# Altium PCB MONA-EXTENTION-BOARD.PCBDOC
Units mm, origin at the board's own origin, x right, y up, seen from the top; angles counter-clockwise.
Board outline 152.4 x 101.6 mm, 2 copper layers (Top Layer, Bottom Layer); 7 components, 0 nets, 99 pads, 0 vias.
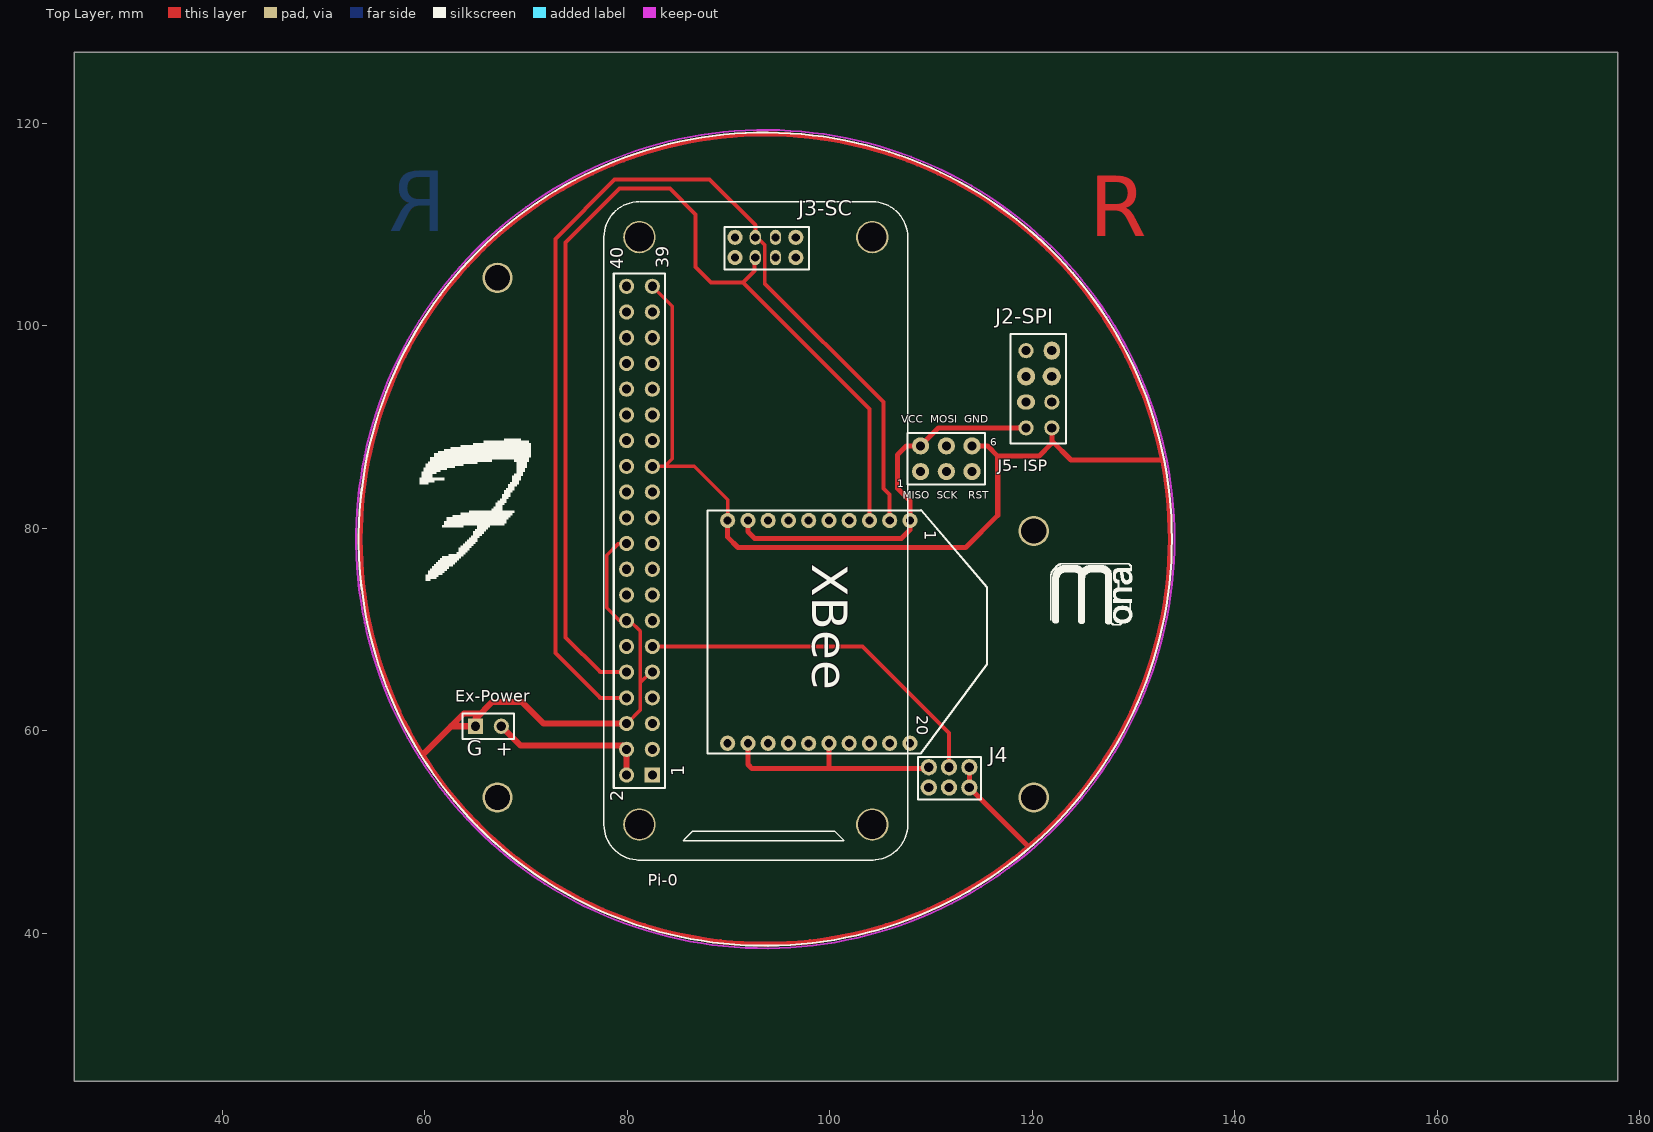
[diagram p0: Top Layer view]
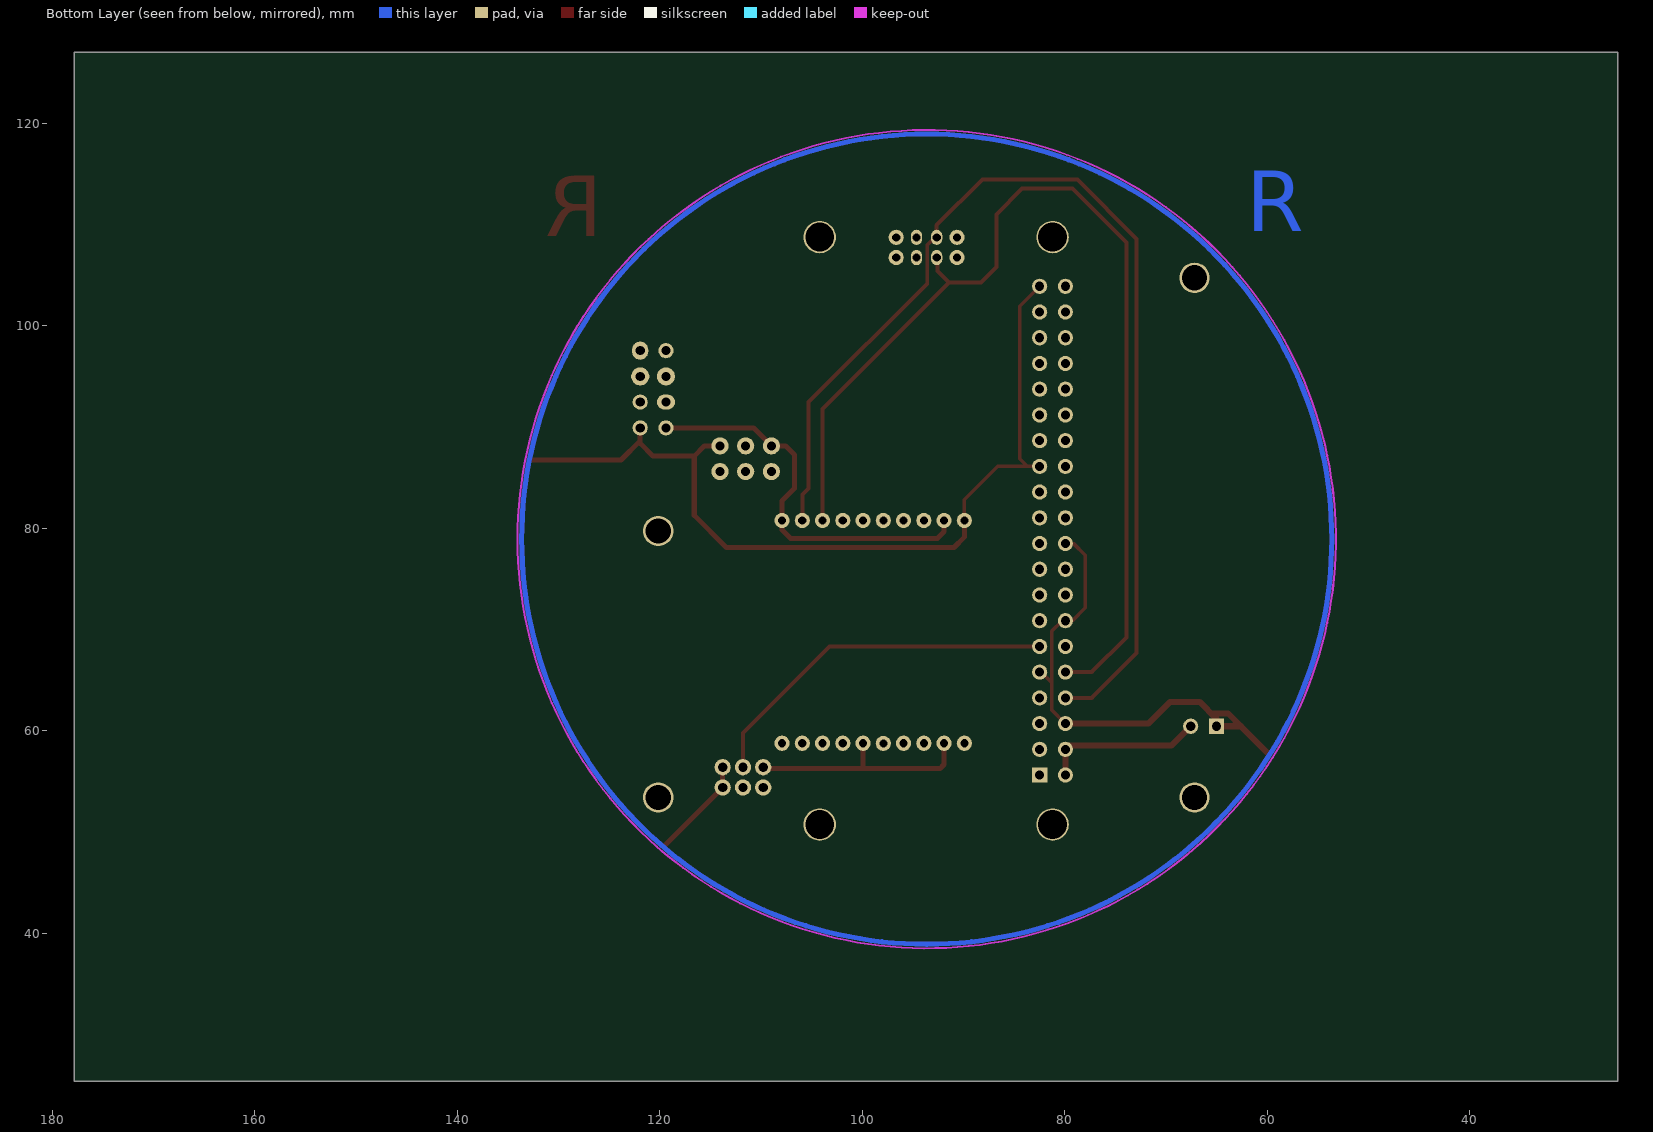
[diagram p1: Bottom Layer view, seen from below]

## Layer stack, top to bottom
Top Layer: signal copper 0.0356
Dielectric: dielectric 0.32, FR-4, Dk 4.8
Bottom Layer: signal copper 0.0356

## Board outline
25.4,25.4 177.8,25.4 177.8,127 25.4,127

## Design rules (kind name [scope] priority, off if disabled: settings)
Clearance [All] p1: gap=0.254
ComponentClearance [All] p1: gap=0.254 collisioncheckmode=3 verticalgap=0.254
PolygonConnect [All] p1: connectstyle=Relief reliefconductorwidth=0.254 reliefentries=4 polygonreliefangle="90 Angle"
RoutingVias [All] p1: holewidth=0.711 width=1.27 viastyle="Through Hole" minholewidth=0.711 minwidth=1.27 maxholewidth=0.711 maxwidth=1.27
SolderMaskExpansion [All] p1: expansion=0.102
TestPointUsage [All] p1: valid=0 allowmultiple=FALSE
Testpoint [All] p1: side=15 testpointundercomponent=TRUE minsize=1.016 maxsize=2.54 preferedsize=1.524 minholesize=0 maxholesize=1.016 preferedholesize=0.813 testpointgrid=0.025 style=1023 order=0123456789
Width [All] p1: maxlimit=0.254 minlimit=0.254 preferedwidth=0.254
18 further rules are at their usual default settings.

## Components (designator, comment, footprint, x,y, rotation, side; value= is the part's Value field where it differs from the comment)
Ex-Power "G  +" HDR1X2 65.024,60.452 r0 top
J3-SC "Comment" HDR2X6_CEN#1 90.85,105.918 r0 top locked
J4 "Comment" HDR2X6_CEN#2 109.982,53.594 r0 top locked
"J5- ISP" "Comment" HDR2X3 108.966,85.598 r0 top
Pi-0 "Comment" "PCBComponent_1 - duplicate21" 107.696,47.244 r90 top locked
? "J2-SPI" "PCBComponent_1 - duplicate18" 123.19,88.646 r180 top locked
? "Comment" "PCBComponent_1 - duplicate22" 89.916,80.772 r270 top locked

## Footprints (in the part's own frame and the unit in brackets; to place one, negate y for a bottom-side part, rotate by r counter-clockwise, add the part's x,y. Pads: shape width x height; smd on the part's side, far side on the other; paste and mask are expansions set on the pad)
HDR1X2 [mm] "Connector; Header; 2 Position"
  rect 1.5x1.5 hole 0.9: 1(0,0)
  round 1.5 hole 0.9: 2(2.54,0)
  silkscreen extent -1.27,-1.27 3.81,1.27
HDR2X3 [mm] "Connector; Header; 3x2 Position"
  round 1.7 hole 0.9: 1(0,0) 2(0,2.54) 3(2.54,0) 4(2.54,2.54) 5(5.08,0) 6(5.08,2.54)
  silkscreen extent -1.27,-1.27 6.35,3.81
HDR2X6_CEN#1 [mm] "Connector; Header; 6x2 Position"
  round 1.5 hole 0.8: 3V3(-0.208,0.812) GND(-0.208,2.812) SCL(5.792,0.812) SDA(5.792,2.812)
  oval 1.1x1.5 hole 0.8: GPIO(3.792,2.812) RST(3.792,0.812) RX(1.792,2.812) TX(1.792,0.812)
  silkscreen extent -1.27,-0.38 7.11,3.81
HDR2X6_CEN#2 [mm] "Connector; Header; 6x2 Position"
  round 1.6 hole 0.9: 3V3(-0.208,2.812) 4V2(-0.208,0.812) GND(3.792,0.812) GND(3.792,2.812) ""(1.792,0.812) ""(1.792,2.812)
  silkscreen extent -1.27,-0.38 4.95,3.81
"PCBComponent_1 - duplicate18" [mm]
  round 1.5 hole 0.9: "1 GND"(1.27,-1.27) "2 Vcc"(3.81,-1.27) "3 CE"(1.27,-3.81) "9 IRQ"(3.81,-8.89)
  oval 1.8x1.5 hole 0.9: "4 CS"(3.81,-3.81)
  round 1.8 hole 0.9: "5 SCK"(1.27,-6.35) "6 MOSI"(3.81,-6.35)
  oval 1.6x1.8 hole 0.9: "7 MISO"(1.27,-8.89)
  silkscreen extent -0.13,-10.54 5.33,0.25
"PCBComponent_1 - duplicate21" [mm]
  round 3.2 hole 2.85: 0(3.5,26.5) 0(3.5,3.5) 0(61.5,3.5) 0(61.5,26.5)
  round 1.5 hole 0.9: "1 SCL"(13.47,25.22) "1 SDA"(10.93,25.22) 5V(8.39,27.76) 5V(10.93,27.76) 7(16.01,25.22) 11(21.09,25.22) 15(26.17,25.22) 16(26.17,27.76) 18(28.71,27.76) 22(33.79,27.76) 27(41.41,25.22) 28(41.41,27.76) 29(43.95,25.22) 31(46.49,25.22) 32(46.49,27.76) 36(51.57,27.76) 37(54.11,25.22) 38(54.11,27.76) 40(56.65,27.76) CS0(36.33,27.76) CS1(38.87,27.76) GND(13.47,27.76) GND(18.55,25.22) GND(23.63,27.76) GND(31.25,27.76) GND(38.87,25.22) GND(43.95,27.76) GND(49.03,27.76) GND(56.65,25.22) MISO(33.79,25.22) MOSI(31.25,25.22) "OUT 3V3"(28.71,25.22) PWM1(49.03,25.22) PWM1(51.57,25.22) "PWM 0"(21.09,27.76) "RX 0"(18.55,27.76) SCK(36.33,25.22) TMS(23.63,25.22) "TX 0"(16.01,27.76)
  round 1.524 hole 0.762: 2(3.5,3.5)
  rect 1.5x1.5 hole 0.9: 3V3(8.39,25.22)
  silkscreen extent 0,0 65,30
"PCBComponent_1 - duplicate22" [mm]
  round 1.5 hole 0.8: CTS(22,2) "D IN"(0,14) "D OUT"(0,16) DIO0(22,18) DIO1(22,16) DIO02(22,14) DIO03(22,12) DIO05(22.01,8) DIO09(22,4) DIO11(0,6) DIO12(0,12) DIO014(22,0) DTR(0,2) GND(0,0) RES(0,4) RES(22,6) RSSI(0,8) RST(0,10) RTS(22,10) Vcc(0,18)
  silkscreen extent -1.03,-2 23,25.61

## Free pads (board coordinates)
  round 3 hole 2.5: 0(67.183,53.422) 0(67.183,104.73) 0(120.142,53.422) 0(120.142,79.73)

## Nets (pads, with @x,y where several pads share a name; then routed paths per layer and width w, separated by ;. In a path a pad name is that pad's centre, name@x,y a point inside that pad or via, vN(x,y) a via of type N, cw(c..) or ccw(c..) an arc to the next point about the centre after c; other vN are vias at no path point)
pads on no net: "?.1 GND" "?.2 Vcc" "?.3 CE" "?.4 CS" "?.5 SCK" "?.6 MOSI" "?.7 MISO" "?.9 IRQ" "?.D IN" "?.D OUT" "J5- ISP.1" "J5- ISP.2" "J5- ISP.3" "J5- ISP.4" "J5- ISP.5" "J5- ISP.6" "Pi-0.1 SCL" "Pi-0.1 SDA" "Pi-0.OUT 3V3" "Pi-0.PWM 0" "Pi-0.RX 0" "Pi-0.TX 0" ?.CTS ?.DIO0 ?.DIO1 ?.DIO02 ?.DIO03 ?.DIO05 ?.DIO09 ?.DIO11 ?.DIO12 ?.DIO014 ?.DTR ?.GND ?.RES ?.RSSI ?.RST ?.RTS ?.Vcc Ex-Power.1 Ex-Power.2 J3-SC.3V3 J3-SC.GND J3-SC.GPIO J3-SC.RST J3-SC.RX J3-SC.SCL J3-SC.SDA J3-SC.TX J4. J4.3V3 J4.4V2 J4.GND Pi-0.0 Pi-0.2 Pi-0.3V3 Pi-0.5V Pi-0.7 Pi-0.11 Pi-0.15 Pi-0.16 Pi-0.18 Pi-0.22 Pi-0.27 Pi-0.28 Pi-0.29 Pi-0.31 Pi-0.32 Pi-0.36 Pi-0.37 Pi-0.38 Pi-0.40 Pi-0.CS0 Pi-0.CS1 Pi-0.GND Pi-0.MISO Pi-0.MOSI Pi-0.PWM1 Pi-0.SCK Pi-0.TMS
copper on no net: | length 981.3
  Top Layer w0.35: 79.764,91.194 79.936,91.194 ; 79.936,60.714 81.28,62.058 81.28,64.77 ; 79.936,78.494 79.129,78.494 77.978,77.343 77.978,72.136 79.24,70.874 79.936,70.874 80.256,70.874 81.28,69.85 81.28,64.77 ; 82.304,65.794 81.28,64.77 ; 82.476,86.114 83.701,86.114 84.455,86.868 84.455,101.915 82.476,103.894 ; 82.804,86.114 86.606,86.114 89.916,82.804 89.916,80.772 ; 92.819,108.73 93.599,107.95 93.599,104.14
  Top Layer w0.4: 79.936,63.254 77.335,63.254 72.898,67.691 72.898,108.585 78.74,114.427 88.138,114.427 92.642,109.923 92.642,108.73 ; 79.936,65.794 77.335,65.794 73.914,69.215 73.914,108.204 79.248,113.538 84.201,113.538 86.741,110.998 86.741,105.791 88.265,104.267 91.44,104.267 ; 82.304,65.794 82.476,65.794 ; 82.476,68.334 103.243,68.334 111.774,59.803 111.774,56.406 ; 92.583,107.061 92.583,105.41 91.44,104.267 ; 92.692,108.73 92.642,108.73 ; 92.819,108.73 92.642,108.73 ; 93.599,104.14 105.283,92.456 105.283,83.947 105.916,83.314 105.916,80.772 ; 96.642,108.73 97.137,108.73 ; 103.916,80.772 103.916,91.791 91.44,104.267
  Top Layer w0.5: 89.916,80.772 89.916,79.121 90.932,78.105 113.411,78.105 116.586,81.28 116.586,87.122 ; 91.916,58.772 91.916,56.674 92.329,56.261 109.855,56.261 ; 91.916,80.772 91.916,79.661 92.583,78.994 107.061,78.994 107.916,79.849 107.916,80.772 107.916,82.711 106.68,83.947 106.68,87.249 107.569,88.138 108.966,88.138 110.744,89.916 119.38,89.916 ; 99.916,56.294 99.916,58.772 ; 113.774,56.406 113.774,54.406 119.507,48.673 ; 114.046,88.138 115.57,88.138 116.586,87.122 ; 132.715,86.741 123.825,86.741 121.92,88.646 121.92,89.916 121.92,88.392 120.65,87.122 116.586,87.122 ; 133.629,78.928 ccw(c93.629,78.928) 133.629,78.928
  Top Layer w0.6: 59.817,57.658 62.611,60.452 ; 65.532,61.722 63.881,61.722 62.611,60.452 ; 67.564,60.452 69.469,58.547 79.563,58.547 79.936,58.174 79.936,55.634 ; 79.936,60.714 71.747,60.714 69.596,62.865 66.675,62.865 65.024,61.214 65.024,60.452 62.611,60.452
  Bottom Layer w0.5: 133.629,78.928 ccw(c93.629,78.928) 133.629,78.928

## Keep-outs
Keep-Out Layer:
  circle w0.2: c93.629,78.928 r40.4

## Other copper
Top Layer:
  text "R" at 125.603,108.839 h6
Bottom Layer:
  text "R" at 62.103,109.347 h6

## Silkscreen, mask and mechanical layers (free items; w line width, h text height)
Top Overlay:
  drawing of 1237 lines, arcs and shapes, not listed

## Text inside footprints (layer, text, board x,y; h text height)
"J5- ISP": Top Overlay "MISO  SCK   RST" at 107.188,82.677 h1.27; Top Overlay "1" at 106.68,83.82 h1.27; Top Overlay "6" at 115.824,87.884 h1.27; Top Overlay "VCC  MOSI  GND" at 107.061,90.17 h1.27
Pi-0: Top Overlay "1" at 85.626,55.494 h1.27 r90; Top Overlay "2" at 79.586,53.054 h1.27 r90; Top Overlay "40" at 79.616,105.584 h1.27 r90; Top Overlay "39" at 84.096,105.654 h1.27 r90
?: Top Overlay "20" at 108.206,61.522 h2 r270; Top Overlay "1" at 108.986,79.822 h2 r270; Top Overlay "XBee" at 97.086,76.492 h6 r270